# EAGLE board CT_schematic (EAGLE 7.6.0)

Size 100 x 80 mm. Coordinates in mm from the lower left corner, seen from the top.
Outline: 0,0 100,0 100,80 0,80 0,0
Copper layers (1*16): Top 0.035mm / dielectric 1.5mm / Bottom 0.035mm
Design rules "default": minimum track width 10mil, minimum drill 24mil, track to track 8mil, track to pad 8mil, pad to pad 8mil, via to via 8mil, smd to smd 8mil, copper to edge 40mil, drill to drill 8mil, minimum pad ring 10mil, minimum via ring 8mil, stop-mask expansion 4mil, vias tented up to drill 0mil, thermal gap 10mil

## Footprints (pad centres in the part's own frame; a part is rotated, then mirrored left to right if it is on the bottom)
C0603 = smd 0.8 x 0.8: 1 -0.762,0; 2 0.762,0
C0402 = smd 0.5 x 0.5: 1 -0.508,0; 2 0.508,0
C1206 = smd 1.3 x 1.6: 1 -1.524,0; 2 1.524,0
C0805 = smd 1.2 x 1.3: 1 -1.016,0; 2 1.016,0
2220 = smd 1.85 x 5.5: 1 -2.55,0; 2 2.55,0
EXV-9H = smd 3.505 x 1.676: 1 -2.857,0; 2 2.857,0
L0603 = smd 0.8 x 0.8: 1 -0.762,0; 2 0.762,0
DR1040 = smd 1.6 x 3.2: 1 -4.458,0; 2 4.458,0
PJ-037B_PACKAGE = drill 3.7 square: 1 12,0 | drill 3.2 square: 2 6,0
R0603 = smd 0.8 x 0.8: 1 -0.762,0; 2 0.762,0
LQFP144 = smd 0.35 x 1.35: 1 -8.75,-10.625; 2 -8.25,-10.625; 3 -7.75,-10.625; 4 -7.25,-10.625; 5 -6.75,-10.625; 6 -6.25,-10.625; 7 -5.75,-10.625; 8 -5.25,-10.625; 9 -4.75,-10.625; 10 -4.25,-10.625; 11 -3.75,-10.625; 12 -3.25,-10.625; 13 -2.75,-10.62; 14 -2.25,-10.625; 15 -1.75,-10.625; 16 -1.25,-10.625; 17 -0.75,-10.625; 18 -0.25,-10.625; 19 0.25,-10.625; 20 0.75,-10.625; 21 1.25,-10.625; 22 1.75,-10.625; 23 2.25,-10.625; 24 2.75,-10.62; 25 3.25,-10.625; 26 3.75,-10.625; 27 4.25,-10.625; 28 4.75,-10.625; 29 5.25,-10.625; 30 5.75,-10.625; 31 6.25,-10.625; 32 6.75,-10.625; 33 7.25,-10.625; 34 7.75,-10.625; 35 8.25,-10.625; 36 8.75,-10.625; 73 8.75,10.625; 74 8.25,10.625; 75 7.75,10.625; 76 7.25,10.625; 77 6.75,10.625; 78 6.25,10.625; 79 5.75,10.625; 80 5.25,10.625; 81 4.75,10.625; 82 4.25,10.625; 83 3.75,10.625; 84 3.25,10.625; 85 2.75,10.625; 86 2.25,10.625; 87 1.75,10.625; 88 1.25,10.625; 89 0.75,10.625; 90 0.25,10.625; 91 -0.25,10.625; 92 -0.75,10.625; 93 -1.25,10.625; 94 -1.75,10.625; 95 -2.25,10.625; 96 -2.75,10.625; 97 -3.25,10.625; 98 -3.75,10.625; 99 -4.25,10.625; 100 -4.75,10.625; 101 -5.25,10.625; 102 -5.75,10.625; 103 -6.25,10.625; 104 -6.75,10.625; 105 -7.25,10.625; 106 -7.75,10.625; 107 -8.25,10.625; 108 -8.75,10.625 | smd 1.35 x 0.35: 37 10.625,-8.75; 38 10.625,-8.25; 39 10.625,-7.75; 40 10.625,-7.25; 41 10.625,-6.75; 42 10.625,-6.25; 43 10.625,-5.75; 44 10.625,-5.25; 45 10.625,-4.75; 46 10.625,-4.25; 47 10.625,-3.75; 48 10.625,-3.25; 49 10.625,-2.75; 50 10.625,-2.25; 51 10.625,-1.75; 52 10.625,-1.25; 53 10.625,-0.75; 54 10.625,-0.25; 55 10.625,0.25; 56 10.625,0.75; 57 10.625,1.25; 58 10.625,1.75; 59 10.625,2.25; 60 10.625,2.75; 61 10.625,3.25; 62 10.625,3.75; 63 10.625,4.25; 64 10.625,4.75; 65 10.625,5.25; 66 10.625,5.75; 67 10.625,6.25; 68 10.625,6.75; 69 10.625,7.25; 70 10.625,7.75; 71 10.625,8.25; 72 10.625,8.75; 109 -10.625,8.75; 110 -10.625,8.25; 111 -10.625,7.75; 112 -10.625,7.25; 113 -10.625,6.75; 114 -10.625,6.25; 115 -10.625,5.75; 116 -10.625,5.25; 117 -10.625,4.75; 118 -10.625,4.25; 119 -10.625,3.75; 120 -10.625,3.25; 121 -10.625,2.75; 122 -10.625,2.25; 123 -10.625,1.75; 124 -10.625,1.25; 125 -10.625,0.75; 126 -10.625,0.25; 127 -10.625,-0.25; 128 -10.625,-0.75; 129 -10.625,-1.25; 130 -10.625,-1.75; 131 -10.625,-2.25; 132 -10.625,-2.75; 133 -10.625,-3.25; 134 -10.625,-3.75; 135 -10.625,-4.25; 136 -10.625,-4.75; 137 -10.625,-5.25; 138 -10.625,-5.75; 139 -10.625,-6.25; 140 -10.625,-6.75; 141 -10.625,-7.25; 142 -10.625,-7.75; 143 -10.625,-8.25; 144 -10.625,-8.75
SOIC-8 = smd 1.6 x 0.6: 1 -2.7,1.905 | smd 1.55 x 0.6: 2 -2.7,0.635; 3 -2.7,-0.635; 4 -2.7,-1.905; 5 2.7,-1.905; 6 2.7,-0.635; 7 2.7,0.635; 8 2.7,1.905
SAMTEC_FTSH-105-01-L-DV-K = smd 0.762 x 2.794: 1 -2.54,-2.032; 2 -2.54,2.032; 3 -1.27,-2.032; 4 -1.27,2.032; 5 0,-2.032; 6 0,2.032; 7 1.27,-2.032; 8 1.27,2.032; 9 2.54,-2.032; 10 2.54,2.032
DFN-10 = smd 0.965 x 0.305: 1 -1.321,1; 2 -1.321,0.5; 3 -1.321,0; 4 -1.321,-0.5; 5 -1.321,-1; 6 1.321,-1; 7 1.321,-0.5; 8 1.321,0; 9 1.321,0.5; 10 1.321,1
QFN-32 = smd 0.6 x 0.3: 1 -2.3,1.75; 2 -2.3,1.25; 3 -2.3,0.75; 4 -2.3,0.25; 5 -2.3,-0.25; 6 -2.3,-0.75; 7 -2.3,-1.25; 8 -2.3,-1.75; 17 2.3,-1.75; 18 2.3,-1.25; 19 2.3,-0.75; 20 2.3,-0.25; 21 2.3,0.25; 22 2.3,0.75; 23 2.3,1.25; 24 2.3,1.75 | smd 0.3 x 0.6: 9 -1.75,-2.3; 10 -1.25,-2.3; 11 -0.75,-2.3; 12 -0.25,-2.3; 13 0.25,-2.3; 14 0.75,-2.3; 15 1.25,-2.3; 16 1.75,-2.3; 25 1.75,2.3; 26 1.25,2.3; 27 0.75,2.3; 28 0.25,2.3; 29 -0.25,2.3; 30 -0.75,2.3; 31 -1.25,2.3; 32 -1.75,2.3 | smd 3.2 x 3.2: EXP 0,0
SJ-43515TS-SMT-TR = smd 2.2 x 3: 1 0.6,-7.4; 4 3.4,-7.4 | smd 3 x 3: 2 12.8,-7.4; 5 17,-3 | smd 2 x 3: 3 5.3,0; 6 2.5,0 | drill 1.8: P$7 4.5,-3.69; P$8 11.54,-3.69
WM-64PC = drill 0.6 pad 1: 1 -1,0.95; 2 -1,-0.95
TSSOP20-I = smd 0.4 x 1.35: 1 -2.925,-2.875; 2 -2.275,-2.875; 3 -1.625,-2.875; 4 -0.975,-2.875; 5 -0.325,-2.875; 6 0.325,-2.875; 7 0.975,-2.875; 8 1.625,-2.875; 9 2.275,-2.875; 10 2.925,-2.875; 11 2.925,2.875; 12 2.275,2.875; 13 1.625,2.875; 14 0.975,2.875; 15 0.325,2.875; 16 -0.325,2.875; 17 -0.975,2.875; 18 -1.625,2.875; 19 -2.275,2.875; 20 -2.925,2.875
HTSS-105-01-G-D = drill 1 pad 1.8 square: 1 0,0 | drill 1 pad 1.8: 2 0,2.54; 3 2.54,0; 4 2.54,2.54; 5 5.08,0; 6 5.08,2.54; 7 7.62,0; 8 7.62,2.54; 9 10.16,0; 10 10.16,2.54
ABS07-32.768KHZ-7-T = smd 1.1 x 2.4: 1 -2.5,0; 2 0,0
ASFL1 = smd 1.7 x 1.5: 1 -1.27,-1.1; 2 1.27,-1.1; 3 1.27,1.1; 4 -1.27,1.1
WSON-8 = smd 0.3 x 0.6: 1 -0.75,0; 2 0.05,0; 3 0.85,0; 4 1.65,0; 5 1.65,3.8; 6 0.85,3.8; 7 0.05,3.8; 8 -0.75,3.8 | smd 3 x 2.6: PAD 0.45,1.9
QFN-16_EP = smd 0.805 x 0.3: 1 -1.452,0.75; 2 -1.452,0.25; 3 -1.452,-0.25; 4 -1.452,-0.75; 9 1.452,-0.75; 10 1.452,-0.25; 11 1.452,0.25; 12 1.452,0.75 | smd 0.3 x 0.805: 5 -0.75,-1.452; 6 -0.25,-1.452; 7 0.25,-1.452; 8 0.75,-1.452; 13 0.75,1.452; 14 0.25,1.452; 15 -0.25,1.452; 16 -0.75,1.452 | smd 1.55 x 1.55: 17 0,0
SON-6 = smd 0.55 x 0.3: 1 -0.355,0.5 | smd 0.52 x 0.3: 2 -0.37,0; 3 -0.37,-0.5; 4 0.37,-0.5; 5 0.37,0; 6 0.37,0.5
SW_4-1437565-2 = smd 1.4 x 2.1: 1 -2.23,4.55; 2 -2.23,-4.55; 3 2.23,4.55; 4 2.23,-4.55
LGM67K-G1J2-24-Z = smd 0.8 x 1.4: A -2,0; C 0,0
NC7SZ125M5X = smd 1.3 x 0.7: 1 -1.3,0.95; 2 -1.3,0; 3 -1.3,-0.95; 4 1.3,-0.95; 5 1.3,0.95

## Placement (x,y rotation side)
C1  1e-06  [C0603]  -30.48,87.63 0 top  (outside the outline)
C2  1e-07  [C0603]  -34.29,87.63 0 top  (outside the outline)
C3  1e-07  [C0603]  -38.1,87.63 0 top  (outside the outline)
C4  1e-07  [C0603]  -41.91,87.63 0 top  (outside the outline)
C5  1e-07  [C0603]  -45.72,87.63 0 top  (outside the outline)
C6  1e-07  [C0603]  -49.53,87.63 0 top  (outside the outline)
C7  1e-07  [C0603]  -53.34,87.63 0 top  (outside the outline)
C8  1e-07  [C0603]  -57.15,87.63 0 top  (outside the outline)
C9  1e-07  [C0603]  -60.96,87.63 0 top  (outside the outline)
C10  1e-07  [C0603]  -64.77,87.63 0 top  (outside the outline)
C11  1e-07  [C0603]  -68.58,87.63 0 top  (outside the outline)
C12  1e-07  [C0603]  -72.39,87.63 0 top  (outside the outline)
C13  1e-07  [C0603]  -76.2,87.63 0 top  (outside the outline)
C14  4.7e-06  [C0603]  -19.05,87.63 0 top  (outside the outline)
C15  1e-07  [C0603]  -80.01,87.63 0 top  (outside the outline)
C16  2.2e-06  [C0603]  -22.86,87.63 0 top  (outside the outline)
C17  2.2e-06  [C0603]  -26.67,87.63 0 top  (outside the outline)
C18  1e-08  [C0603]  -83.82,87.63 0 top  (outside the outline)
C19  1e-06  [C0603]  -87.63,87.63 0 top  (outside the outline)
C20  1e-07  [C0603]  -15.24,92.71 0 top  (outside the outline)
C21  1e-11  [C0402]  -36.83,97.79 0 top  (outside the outline)
C22  1e-11  [C0402]  -40.64,97.79 0 top  (outside the outline)
C23  1e-08  [C0402]  -44.45,97.79 0 top  (outside the outline)
C24  1e-07  [C0402]  -48.26,97.79 0 top  (outside the outline)
C25  1e-07  [C0402]  -52.07,97.79 0 top  (outside the outline)
C26  1e-07  [C0402]  -55.88,97.79 0 top  (outside the outline)
C27  1e-06  [C0603]  -19.05,92.71 0 top  (outside the outline)
C28  1e-07  [C0402]  -59.69,97.79 0 top  (outside the outline)
C29  1e-07  [C0402]  -63.5,97.79 0 top  (outside the outline)
C30  1e-06  [C0603]  -22.86,92.71 0 top  (outside the outline)
C31  1e-06  [C0603]  -26.67,92.71 0 top  (outside the outline)
C32  1e-06  [C0603]  -30.48,92.71 0 top  (outside the outline)
C33  1e-06  [C0603]  -34.29,92.71 0 top  (outside the outline)
C34  1e-06  [C0603]  -38.1,92.71 0 top  (outside the outline)
C35  1e-06  [C0603]  -41.91,92.71 0 top  (outside the outline)
C36  1e-06  [C0603]  -45.72,92.71 0 top  (outside the outline)
C37  1e-07  [C0402]  -67.31,97.79 0 top  (outside the outline)
C38  1e-07  [C0402]  -71.12,97.79 0 top  (outside the outline)
C39  1e-07  [C0402]  -74.93,97.79 0 top  (outside the outline)
C40  1e-07  [C0402]  -78.74,97.79 0 top  (outside the outline)
C41  1e-06  [C0603]  -49.53,92.71 0 top  (outside the outline)
C42  1e-07  [C0402]  -82.55,97.79 0 top  (outside the outline)
C43  1e-07  [C0402]  -86.36,97.79 0 top  (outside the outline)
C44  1e-07  [C0402]  -90.17,97.79 0 top  (outside the outline)
C45  1e-07  [C0402]  -15.24,102.87 0 top  (outside the outline)
C46  1e-07  [C0402]  -19.05,102.87 0 top  (outside the outline)
C47  1e-07  [C0402]  -22.86,102.87 0 top  (outside the outline)
C48  1e-08  [C0402]  -26.67,102.87 0 top  (outside the outline)
C49  1e-08  [C0402]  -30.48,102.87 0 top  (outside the outline)
C50  1e-08  [C0402]  -34.29,102.87 0 top  (outside the outline)
C51  1e-05  [C1206]  -59.69,74.93 0 top  (outside the outline)
C52  1e-05  [C0805]  -77.47,74.93 0 top  (outside the outline)
C53  1e-05  [C0805]  -82.55,74.93 0 top  (outside the outline)
C54  1e-06  [C0603]  -53.34,92.71 0 top  (outside the outline)
C55  1e-07  [C0402]  -38.1,102.87 0 top  (outside the outline)
C56  6.8e-05  [2220]  -16.51,67.31 0 top  (outside the outline)
C57  1e-07  [C0402]  -41.91,102.87 0 top  (outside the outline)
C58  0.0001  [EXV-9H]  -81.28,67.31 0 top  (outside the outline)
C59  0.0001  [EXV-9H]  -17.78,76.2 0 top  (outside the outline)
C60  1e-08  [C0402]  -45.72,102.87 0 top  (outside the outline)
C61  1e-08  [C0402]  -49.53,102.87 0 top  (outside the outline)
F1  240.0  [L0603]  -57.15,92.71 0 top  (outside the outline)
I1  5.2e-06  [DR1040]  -19.05,57.15 0 top  (outside the outline)
J1  PJ-037B  [PJ-037B_PACKAGE]  -55.88,44.45 0 top  (outside the outline)
R2  1000.0  [R0603]  -60.96,92.71 0 top  (outside the outline)
R4  4700.0  [R0603]  -64.77,92.71 0 top  (outside the outline)
R5  2200.0  [R0603]  -68.58,92.71 0 top  (outside the outline)
R6  2200.0  [R0603]  -72.39,92.71 0 top  (outside the outline)
R7  10000.0  [R0603]  -30.48,82.55 0 top  (outside the outline)
R8  10000.0  [R0603]  -35.56,82.55 0 top  (outside the outline)
R9  10000.0  [R0603]  -40.64,82.55 0 top  (outside the outline)
R10  10000.0  [R0603]  -45.72,82.55 0 top  (outside the outline)
R11  10000.0  [R0603]  -50.8,82.55 0 top  (outside the outline)
R12  10000.0  [R0603]  -55.88,82.55 0 top  (outside the outline)
R13  10000.0  [R0603]  -60.96,82.55 0 top  (outside the outline)
R14  10000.0  [R0603]  -66.04,82.55 0 top  (outside the outline)
R15  10000.0  [R0603]  -71.12,82.55 0 top  (outside the outline)
R16  5.0  [R0603]  -76.2,92.71 0 top  (outside the outline)
R17  1270.0  [R0603]  -80.01,92.71 0 top  (outside the outline)
R18  1270.0  [R0603]  -83.82,92.71 0 top  (outside the outline)
R19  100000.0  [R0603]  -87.63,74.93 0 top  (outside the outline)
R20  200.0  [R0603]  -87.63,92.71 0 top  (outside the outline)
R21  1000.0  [R0603]  -15.24,97.79 0 top  (outside the outline)
R22  20000.0  [R0603]  -76.2,82.55 0 top  (outside the outline)
R23  91000.0  [R0603]  -81.28,82.55 0 top  (outside the outline)
R24  300000.0  [R0603]  -15.24,82.55 0 top  (outside the outline)
R25  10000.0  [R0603]  -86.36,82.55 0 top  (outside the outline)
R26  10000.0  [R0603]  -15.24,87.63 0 top  (outside the outline)
R27  9100.0  [R0603]  -19.05,97.79 0 top  (outside the outline)
R28  680000.0  [R0603]  -20.32,82.55 0 top  (outside the outline)
R29  120000.0  [R0603]  -25.4,82.55 0 top  (outside the outline)
U1  STM32F777ZIT6  [LQFP144]  -24.13,11.43 0 top  (outside the outline)
U2  AT25020B-SSHL-T  [SOIC-8]  -81.28,57.15 0 top  (outside the outline)
U3  FTSH-105-01-L-DV-K  [SAMTEC_FTSH-105-01-L-DV-K]  -58.42,7.62 0 top  (outside the outline)
U4  MAG3110FCR1  [DFN-10]  -30.48,97.79 0 top  (outside the outline)
U5  SGTL5000XNAA3  [QFN-32]  -45.72,57.15 0 top  (outside the outline)
U6  SJ-43515TS-SMT-TR  [SJ-43515TS-SMT-TR]  -39.37,33.02 0 top  (outside the outline)
U7  SJ-43515TS-SMT-TR  [SJ-43515TS-SMT-TR]  -67.31,33.02 0 top  (outside the outline)
U8  SJ-43515TS-SMT-TR  [SJ-43515TS-SMT-TR]  -39.37,46.99 0 top  (outside the outline)
U9  WM-64PCT  [WM-64PC]  -31.75,57.15 0 top  (outside the outline)
U10  SP3203ECY-L/TR  [TSSOP20-I]  -87.63,43.18 0 top  (outside the outline)
U11  HTSS-105-01-G-D  [HTSS-105-01-G-D]  -66.04,55.88 0 top  (outside the outline)
U12  ABS07-32.768KHZ-7-T  [ABS07-32.768KHZ-7-T]  -39.37,76.2 0 top  (outside the outline)
U13  ASFL-24.57MHZ-NCS  [ASFL1]  -55.88,67.31 0 top  (outside the outline)
U14  ASFL1-25MHZ-NCS  [ASFL1]  -72.39,67.31 0 top  (outside the outline)
U15  LP3878SDX-ADJ/NOPB  [WSON-8]  -38.1,66.04 0 top  (outside the outline)
U16  LTC3601EUD#PBF  [QFN-16_EP]  -24.13,97.79 0 top  (outside the outline)
U17  TPS3895ADRYR  [SON-6]  -52.07,101.6 0 top  (outside the outline)
U18  4-1437565-2  [SW_4-1437565-2]  -72.39,44.45 0 top  (outside the outline)
U19  Q65110A2395  [LGM67K-G1J2-24-Z]  -48.26,76.2 0 top  (outside the outline)
U20  nc7sz125m5x  [NC7SZ125M5X]  -64.77,74.93 0 top  (outside the outline)
U21  nc7sz125m5x  [NC7SZ125M5X]  -71.12,74.93 0 top  (outside the outline)

## Library data of the parts
C1-C61 F1 I1 J1 R2 R4-R29 U1-U21 = circuit_tree

## Nets
CLK_CRYSTAL_U1_8: C21.1 U1.8 U12.1
CLK_CRYSTAL_U1_9: C22.1 U1.9 U12.2
CLK_U1_23: U1.23 U14.3
CLK_U5_21: U5.21 U13.3
GND: C1.2 C2.2 C3.2 C4.2 C5.2 C6.2 C7.2 C8.2 C9.2 C10.2 C11.2 C12.2 C13.2 C14.2 C15.2 C16.2 C17.2 C18.2 C19.2 C20.2 C21.2 C22.2 C23.2 C24.2 C25.2 C26.2 C27.2 C28.2 C29.2 C37.2 C38.2 C39.2 C40.2 C41.2 C42.2 C43.2 C46.2 C47.2 C48.2 C49.2 C50.2 C51.2 C52.2 C53.2 C54.2 C56.1 C56.2 C57.2 C58.2 C59.2 C60.2 C61.2 J1.2 R2.2 R7.2 R15.2 R16.2 R18.2 R21.2 R22.2 R24.2 R27.2 R29.2 U1.16 U1.31 U1.38 U1.51 U1.61 U1.83 U1.94 U1.107 U1.120 U1.130 U2.4 U3.3 U3.5 U4.5 U4.10 U5.1 U5.3 U5.7 U5.EXP U7.1 U8.1 U9.2 U10.18 U11.9 U13.2 U14.2 U15.3 U15.PAD U16.1 U16.9 U16.17 U17.2 U19.C U20.2 U20.3 U21.1 U21.3
NET_U1_25: R4.1 U1.25 U21.4
NET_U1_33: C18.1 C19.1 F1.1 U1.32 U1.33
NET_U1_71: C16.1 U1.71
NET_U1_106: C17.1 U1.106
NET_U1_136: R5.1 U1.136 U4.7
NET_U1_137: R6.1 U1.137 U4.6
NET_U1_138: R7.1 U1.138
NET_U1_141: U19.A
NET_U1_142: U18.3 U18.4
NET_U1_143: R8.1 U1.143
NET_U2_3: R9.1 U2.3
NET_U2_7: R11.1 U2.7
NET_U3_9: R16.1 U3.9
NET_U4_1: C25.1 U4.1
NET_U4_4: C28.1 U4.4
NET_U5_10: C40.1 U5.10
NET_U5_29: R17.1 U5.29
NET_U5_31: R18.1 U5.31
NET_U6_1: U5.4 U6.1
NET_U6_2: U5.2 U6.2
NET_U6_5: U5.6 U6.5
NET_U7_2: C31.1 U7.2
NET_U7_5: C30.1 U7.5
NET_U7_11: C31.2
NET_U7_12: C30.2
NET_U8_2: C33.1 C34.1 U8.2
NET_U8_5: C32.1 U8.5
NET_U8_13: C33.2 C34.2
NET_U8_14: C32.2
NET_U9_1: C35.1 C36.1 C41.1 U5.16 U9.1
NET_U9_15: C35.2 C36.2
NET_U10_1: C44.1 U10.1
NET_U10_2: C46.1 U10.2
NET_U10_3: C44.2 U10.3
NET_U10_4: C45.1 U10.4
NET_U10_5: C45.2 U10.5
NET_U10_6: C47.1 U10.6
NET_U10_20: U10.20
NET_U11_3: U10.14 U11.3
NET_U11_4: U10.13 U11.4
NET_U11_5: U10.17 U11.5
NET_U11_6: U10.16 U11.6
NET_U15_1: C50.1 U15.1
NET_U15_6: R20.2 R21.1 U15.6
NET_U15_8: R19.1 U15.8
NET_U16_3: C55.2 I1.1 U16.3 U16.4
NET_U16_6: C55.1 U16.6
NET_U16_7: C54.1 U16.7 U16.12
NET_U16_10: R24.1 U16.10
NET_U16_11: R22.1 R23.1 U16.11
NET_U16_14: U16.14
NET_U16_ATNET_3: I1.2 R23.2
NET_U17_1: R26.1 R27.1 U17.1
NET_U17_3: R28.2 R29.1 U17.3
NET_U17_4: R25.1 U17.4 U20.4 U21.2
NET_U18_1: R2.1 U18.1 U18.2
PROC_I2S1_CK: U1.126 U5.24
PROC_I2S1_SD: U1.123 U5.26
PROC_I2S1_WS: U1.125 U5.23
PROC_SPI1_MISO: U1.42 U2.2
PROC_SPI1_MOSI: U1.43 U2.5
PROC_SPI1_NSS: R10.1 U1.40 U2.1
PROC_SPI1_SCK: U1.41 U2.6
PROC_SYS_JTCK_SWCLK: R15.1 U1.109 U3.4
PROC_SYS_JTDI: R13.1 U1.110 U3.8
PROC_SYS_JTDO_SWO: U1.133 U3.6
PROC_SYS_JTMS_SWDIO: R14.1 U1.105 U3.2
PROC_UART4_CTS: U1.46 U10.8
PROC_UART4_RTS: U1.75 U10.10
PROC_UART4_RX: U1.35 U10.11
PROC_UART4_TX: U1.34 U10.7
RST_OUT_U3_JTAG_RST_B: R12.1 U3.10 U20.1
VCC_S1_7V9: C51.1 C53.1 C58.1 C59.1 J1.1 R19.2 U15.4 U16.15 U16.16
VCC_TIER1_1V2: C37.1 C52.1 R20.1 U5.30 U15.5
VCC_TIER1_3V3: C1.1 C2.1 C3.1 C4.1 C5.1 C6.1 C7.1 C8.1 C9.1 C10.1 C11.1 C12.1 C13.1 C14.1 C15.1 C20.1 C23.1 C24.1 C26.1 C27.1 C29.1 C38.1 C39.1 C42.1 C43.1 C48.1 C49.1 C56.2 C57.1 C60.1 C61.1 F1.2 I1.2 R4.2 R5.2 R6.2 R8.2 R9.2 R10.2 R11.2 R12.2 R13.2 R14.2 R17.2 R23.2 R25.2 R26.2 R28.1 U1.6 U1.17 U1.30 U1.39 U1.52 U1.62 U1.72 U1.84 U1.95 U1.108 U1.121 U1.131 U1.144 U2.8 U3.1 U4.2 U4.8 U5.5 U5.20 U10.12 U10.19 U13.4 U14.4 U16.8 U17.6 U20.5 U21.5

## Tracks (layer width: path | path; a pad name or v marks a point on that pad's centre or on a via)
CLK_CRYSTAL_U1_8  (2 unrouted)
CLK_CRYSTAL_U1_9  (2 unrouted)
CLK_U1_23  (1 unrouted)
CLK_U5_21  (1 unrouted)
GND  (99 unrouted)
NET_U1_25  (2 unrouted)
NET_U1_33  (4 unrouted)
NET_U1_71  (1 unrouted)
NET_U1_106  (1 unrouted)
NET_U1_136  (2 unrouted)
NET_U1_137  (2 unrouted)
NET_U1_138  (1 unrouted)
NET_U1_142  (1 unrouted)
NET_U1_143  (1 unrouted)
NET_U2_3  (1 unrouted)
NET_U2_7  (1 unrouted)
NET_U3_9  (1 unrouted)
NET_U4_1  (1 unrouted)
NET_U4_4  (1 unrouted)
NET_U5_10  (1 unrouted)
NET_U5_29  (1 unrouted)
NET_U5_31  (1 unrouted)
NET_U6_1  (1 unrouted)
NET_U6_2  (1 unrouted)
NET_U6_5  (1 unrouted)
NET_U7_2  (1 unrouted)
NET_U7_5  (1 unrouted)
NET_U8_2  (2 unrouted)
NET_U8_5  (1 unrouted)
NET_U8_13  (1 unrouted)
NET_U9_1  (4 unrouted)
NET_U9_15  (1 unrouted)
NET_U10_1  (1 unrouted)
NET_U10_2  (1 unrouted)
NET_U10_3  (1 unrouted)
NET_U10_4  (1 unrouted)
NET_U10_5  (1 unrouted)
NET_U10_6  (1 unrouted)
NET_U11_3  (1 unrouted)
NET_U11_4  (1 unrouted)
NET_U11_5  (1 unrouted)
NET_U11_6  (1 unrouted)
NET_U15_1  (1 unrouted)
NET_U15_6  (2 unrouted)
NET_U15_8  (1 unrouted)
NET_U16_3  (3 unrouted)
NET_U16_6  (1 unrouted)
NET_U16_7  (2 unrouted)
NET_U16_10  (1 unrouted)
NET_U16_11  (2 unrouted)
NET_U16_ATNET_3  (1 unrouted)
NET_U17_1  (2 unrouted)
NET_U17_3  (2 unrouted)
NET_U17_4  (3 unrouted)
NET_U18_1  (2 unrouted)
PROC_I2S1_CK  (1 unrouted)
PROC_I2S1_SD  (1 unrouted)
PROC_I2S1_WS  (1 unrouted)
PROC_SPI1_MISO  (1 unrouted)
PROC_SPI1_MOSI  (1 unrouted)
PROC_SPI1_NSS  (2 unrouted)
PROC_SPI1_SCK  (1 unrouted)
PROC_SYS_JTCK_SWCLK  (2 unrouted)
PROC_SYS_JTDI  (2 unrouted)
PROC_SYS_JTDO_SWO  (1 unrouted)
PROC_SYS_JTMS_SWDIO  (2 unrouted)
PROC_UART4_CTS  (1 unrouted)
PROC_UART4_RTS  (1 unrouted)
PROC_UART4_RX  (1 unrouted)
PROC_UART4_TX  (1 unrouted)
RST_OUT_U3_JTAG_RST_B  (2 unrouted)
VCC_S1_7V9  (8 unrouted)
VCC_TIER1_1V2  (4 unrouted)
VCC_TIER1_3V3  (74 unrouted)